# Altium PCB PCB.PcbDoc (part 2 of 2)
Units mm, origin at the board's own origin, x right, y up, seen from the top; angles counter-clockwise.
Board outline 86.36 x 54.61 mm, 4 copper layers (Component Side, Ground Plane, Power Plane, Solder Side), stack 1.226 mm thick; 22 components, 51 nets, 416 pads, 113 vias.
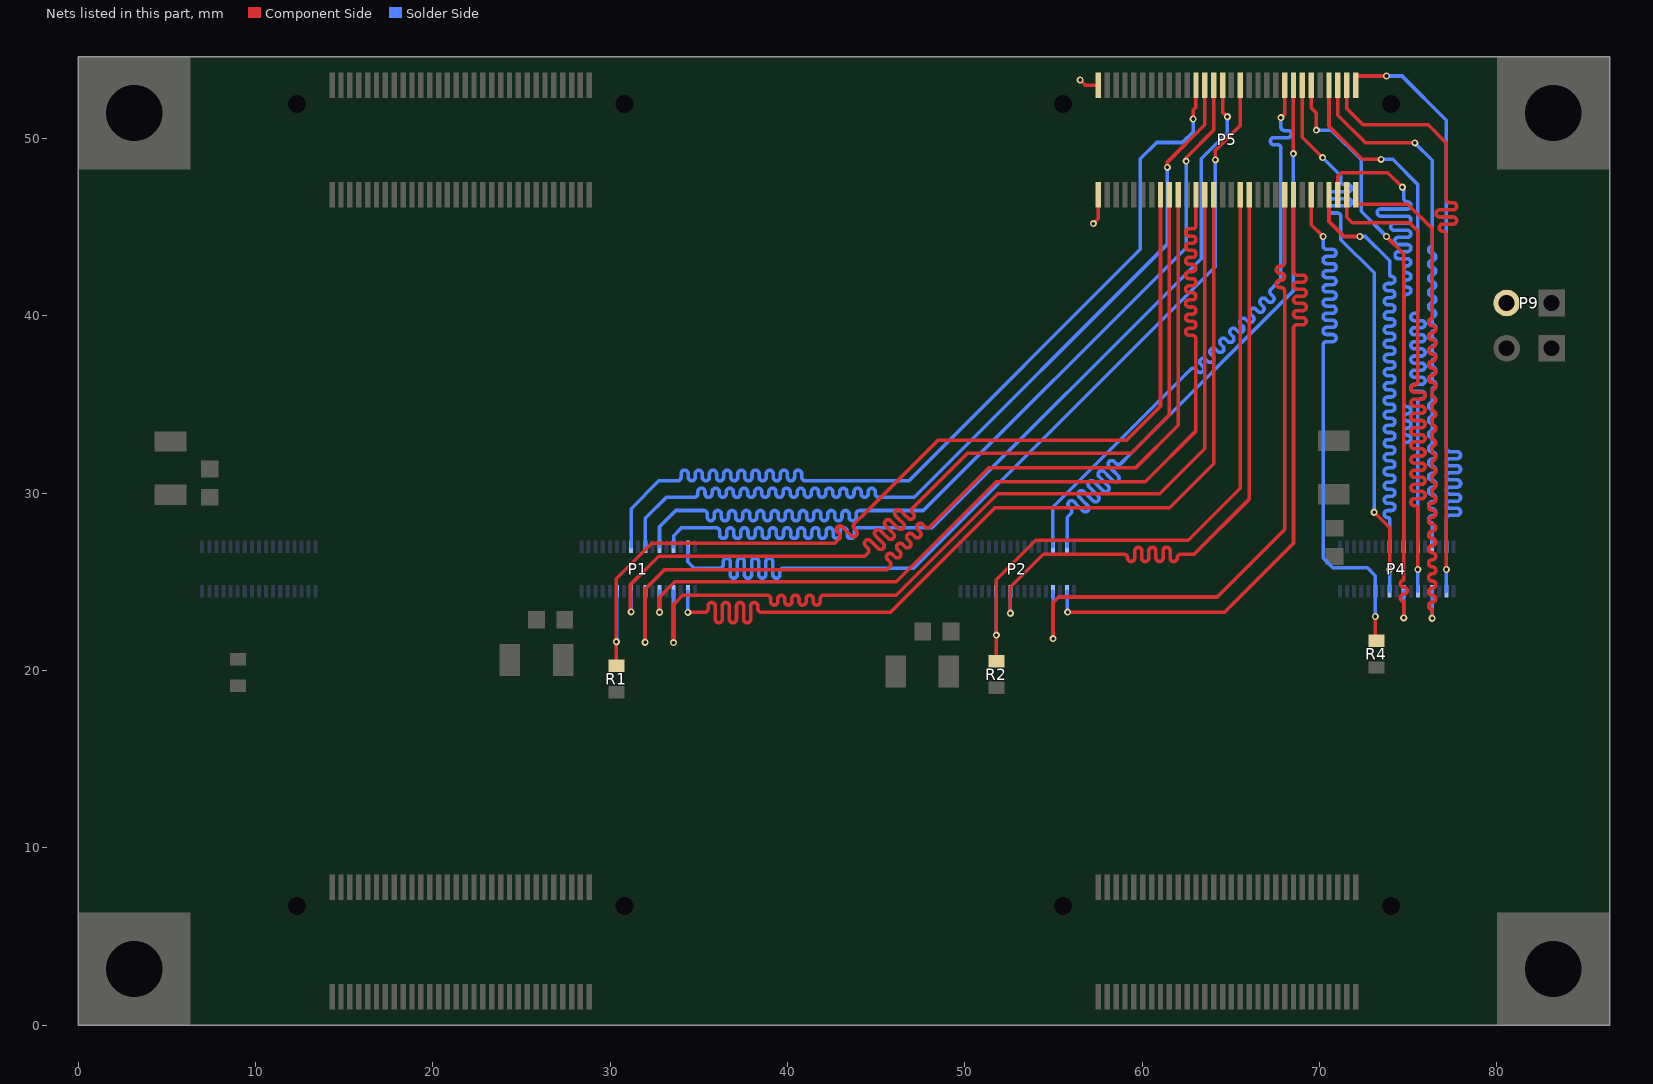
[diagram p4: the nets of this part, all layers, seen from the top]

## Via types
v1: diameter 0.4, hole 0.2, Component Side to Solder Side, tented both sides, 113 vias

## Nets (pads, with @x,y where several pads share a name; then routed paths per layer and width w, separated by ;. In a path a pad name is that pad's centre, name@x,y a point inside that pad or via, vN(x,y) a via of type N, cw(c..) or ccw(c..) an arc to the next point about the centre after c; other vN are vias at no path point) (continued)
SD2DATA3: P2.10 P5.36 | length 39.6
  Component Side w0.2: v1(52.567,23.233) 52.567,24.692 54.425,26.55 55.6,26.55 58.975,26.55 cw(c58.975,26.35) 59.175,26.35 ccw(c59.375,26.35) 59.375,26.15 ccw(c59.375,26.35) 59.575,26.35 59.575,26.55 59.575,26.75 cw(c59.775,26.75) 59.775,26.95 cw(c59.775,26.75) 59.975,26.75 59.975,26.55 59.975,26.35 ccw(c60.175,26.35) 60.175,26.15 ccw(c60.175,26.35) 60.375,26.35 60.375,26.55 60.375,26.75 cw(c60.575,26.75) 60.575,26.95 cw(c60.575,26.75) 60.775,26.75 60.775,26.55 60.775,26.35 ccw(c60.975,26.35) 60.975,26.15 ccw(c60.975,26.35) 61.175,26.35 61.175,26.55 61.175,26.75 cw(c61.375,26.75) 61.375,26.95 cw(c61.375,26.75) 61.575,26.75 61.575,26.55 61.575,26.35 ccw(c61.775,26.35) 61.775,26.15 ccw(c61.775,26.35) 61.975,26.35 cw(c62.175,26.35) 62.175,26.55 62.925,26.55 66.025,29.65 66.025,46.825 P5.36@66.032,46.832
  Solder Side w0.2: v1(52.567,23.233) P2.10@52.567,24.475
SD2DATA4: P2.4 P5.44 | length 39.6
  Component Side w0.2: v1(54.975,21.8) 54.975,23.825 55.3,24.15 64.225,24.15 68.032,27.957 68.032,37.225 68.032,41.4 ccw(c67.832,41.4) 67.832,41.6 67.759,41.6 cw(c67.759,41.8) 67.559,41.8 cw(c67.759,41.8) 67.759,42 67.832,42 ccw(c67.832,42.2) 68.032,42.2 ccw(c67.832,42.2) 67.832,42.4 67.759,42.4 cw(c67.759,42.6) 67.559,42.6 cw(c67.759,42.6) 67.759,42.8 67.832,42.8 ccw(c67.832,43) 68.032,43 68.032,43.2 68.032,43.4 P5.44@68.032,46.832
  Solder Side w0.2: P2.4@54.967,24.475 54.967,24.309 54.975,24.301 v1(54.975,21.8)
SD2DATA5: P2.2 P5.46 | length 39.6
  Component Side w0.2: v1(55.8,23.3) 64.65,23.3 68.532,27.182 68.532,30.15 68.532,39.3 cw(c68.732,39.3) 68.732,39.5 69.051,39.5 ccw(c69.051,39.7) 69.251,39.7 ccw(c69.051,39.7) 69.051,39.9 68.732,39.9 cw(c68.732,40.1) 68.532,40.1 cw(c68.732,40.1) 68.732,40.3 69.051,40.3 ccw(c69.051,40.5) 69.251,40.5 ccw(c69.051,40.5) 69.051,40.7 68.732,40.7 cw(c68.732,40.9) 68.532,40.9 cw(c68.732,40.9) 68.732,41.1 69.051,41.1 ccw(c69.051,41.3) 69.251,41.3 ccw(c69.051,41.3) 69.051,41.5 68.732,41.5 cw(c68.732,41.7) 68.532,41.7 cw(c68.732,41.7) 68.732,41.9 69.051,41.9 ccw(c69.051,42.1) 69.251,42.1 ccw(c69.051,42.1) 69.051,42.3 68.732,42.3 cw(c68.732,42.5) 68.532,42.5 P5.46@68.532,46.832
  Solder Side w0.2: P2.2@55.767,24.475 55.767,23.333 v1(55.8,23.3)
SD2DATA6: P2.33 P5.45 | length 39.6
  Component Side w0.2: v1(68.525,49.15) 68.525,52.961 68.55,52.986 P5.45@68.532,53.004
  Solder Side w0.2: P2.33@55.767,26.975 55.767,28.642 55.975,28.85 ccw(c55.834,28.991) 55.975,29.133 55.873,29.235 cw(c56.014,29.376) 55.873,29.518 cw(c56.014,29.376) 56.156,29.518 56.399,29.274 56.662,29.011 ccw(c56.804,29.153) 56.945,29.011 ccw(c56.804,29.153) 56.945,29.294 56.682,29.557 56.439,29.801 cw(c56.58,29.942) 56.439,30.083 cw(c56.58,29.942) 56.722,30.083 56.965,29.84 57.228,29.577 ccw(c57.369,29.718) 57.511,29.577 ccw(c57.369,29.718) 57.511,29.86 57.248,30.123 57.004,30.366 cw(c57.146,30.508) 57.004,30.649 cw(c57.146,30.508) 57.287,30.649 57.531,30.406 57.794,30.143 ccw(c57.935,30.284) 58.076,30.143 ccw(c57.935,30.284) 58.076,30.425 57.813,30.688 57.57,30.932 cw(c57.711,31.073) 57.57,31.215 cw(c57.711,31.073) 57.853,31.215 58.096,30.971 58.359,30.708 ccw(c58.501,30.85) 58.642,30.708 ccw(c58.501,30.85) 58.642,30.991 58.379,31.254 58.136,31.498 cw(c58.277,31.639) 58.136,31.78 cw(c58.277,31.639) 58.419,31.78 58.521,31.678 ccw(c58.662,31.82) 58.803,31.678 59.35,32.225 68.525,41.4 v1(68.525,49.15)
SD2DATA7: P2.31 P5.43 | length 39.6
  Component Side w0.2: v1(67.825,51.175) 68.032,51.382 P5.43@68.032,53.004
  Solder Side w0.2: P2.31@54.967,26.975 54.967,29.217 58.288,32.537 62.734,36.984 cw(c62.875,36.842) 63.017,36.984 63.135,36.866 ccw(c63.276,37.007) 63.418,36.866 ccw(c63.276,37.007) 63.418,37.148 63.3,37.267 cw(c63.441,37.408) 63.3,37.55 cw(c63.441,37.408) 63.582,37.55 63.701,37.431 ccw(c63.842,37.573) 63.983,37.431 ccw(c63.842,37.573) 63.983,37.714 63.865,37.832 cw(c64.007,37.974) 63.865,38.115 cw(c64.007,37.974) 64.148,38.115 64.266,37.997 ccw(c64.408,38.138) 64.549,37.997 ccw(c64.408,38.138) 64.549,38.28 64.431,38.398 cw(c64.572,38.539) 64.431,38.681 cw(c64.572,38.539) 64.714,38.681 64.832,38.563 ccw(c64.973,38.704) 65.115,38.563 ccw(c64.973,38.704) 65.115,38.846 64.997,38.964 cw(c65.138,39.105) 64.997,39.247 cw(c65.138,39.105) 65.279,39.247 65.398,39.128 ccw(c65.539,39.27) 65.68,39.128 ccw(c65.539,39.27) 65.68,39.411 65.562,39.529 cw(c65.704,39.671) 65.562,39.812 cw(c65.704,39.671) 65.845,39.812 65.963,39.694 ccw(c66.105,39.835) 66.246,39.694 ccw(c66.105,39.835) 66.246,39.977 66.128,40.095 cw(c66.269,40.237) 66.128,40.378 cw(c66.269,40.237) 66.411,40.378 66.529,40.26 ccw(c66.67,40.401) 66.812,40.26 ccw(c66.67,40.401) 66.812,40.543 66.694,40.661 cw(c66.835,40.802) 66.694,40.944 cw(c66.835,40.802) 66.976,40.944 67.095,40.825 ccw(c67.236,40.967) 67.378,40.825 ccw(c67.236,40.967) 67.378,41.108 67.259,41.226 cw(c67.401,41.368) 67.259,41.509 67.401,41.651 67.684,41.934 67.825,42.075 67.825,42.45 67.825,42.85 67.825,43.25 67.825,43.65 67.825,44.05 67.825,44.45 67.825,44.85 67.825,45.25 67.825,45.65 67.825,46.05 67.825,46.45 67.825,46.85 67.825,47.25 67.825,47.65 67.825,48.05 67.825,48.45 67.825,48.85 67.825,49.25 67.825,49.45 ccw(c67.625,49.45) 67.625,49.65 67.43,49.65 cw(c67.43,49.85) 67.23,49.85 cw(c67.43,49.85) 67.43,50.05 67.825,50.05 68.22,50.05 ccw(c68.22,50.25) 68.42,50.25 ccw(c68.22,50.25) 68.22,50.45 68.025,50.45 cw(c68.025,50.65) 67.825,50.65 v1(67.825,51.175)
SD2RESET: P2.12 P5.34 R2.2 | length 39.6
  Component Side w0.2: R2.2@51.775,20.5 R2.2@51.775,20.525 v1(51.775,22) 51.775,25.108 51.767,25.117 54,27.35 62.6,27.35 65.532,30.282 P5.34@65.532,46.832
  Solder Side w0.2: P2.12@51.767,24.475 51.775,24.467 v1(51.775,22)
SD3CLK: P1.8 P5.20 | length 56.1
  Component Side w0.2: v1(31.975,21.6) 31.975,24.6 33.05,25.675 45.6,25.675 45.775,25.85 ccw(c45.634,25.991) 45.775,26.133 45.643,26.265 cw(c45.785,26.406) 45.643,26.547 cw(c45.785,26.406) 45.926,26.547 46.058,26.416 ccw(c46.199,26.557) 46.341,26.416 ccw(c46.199,26.557) 46.341,26.699 46.209,26.83 cw(c46.35,26.972) 46.209,27.113 cw(c46.35,26.972) 46.492,27.113 46.624,26.981 ccw(c46.765,27.123) 46.906,26.981 ccw(c46.765,27.123) 46.906,27.264 46.775,27.396 cw(c46.916,27.537) 46.775,27.679 cw(c46.916,27.537) 47.057,27.679 47.189,27.547 ccw(c47.331,27.688) 47.472,27.547 ccw(c47.331,27.688) 47.472,27.83 47.34,27.962 cw(c47.482,28.103) 47.34,28.245 cw(c47.482,28.103) 47.623,28.245 47.755,28.113 ccw(c47.896,28.254) 48.038,28.113 49.838,29.913 51.35,31.425 59.625,31.425 62.032,33.832 P5.20@62.032,46.832
  Solder Side w0.2: v1(31.975,21.6) 31.975,24.467 P1.8@31.983,24.475
SD3CMD: P1.25 P5.23 | length 56
  Component Side w0.2: v1(62.875,51.1) 62.875,51.618 63.032,51.775 P5.23@63.032,53.004
  Solder Side w0.2: P1.25@31.183,26.975 31.183,29.133 32.75,30.7 33.8,30.7 ccw(c33.8,30.9) 34,30.9 34,31.1 cw(c34.2,31.1) 34.2,31.3 cw(c34.2,31.1) 34.4,31.1 34.4,30.9 ccw(c34.6,30.9) 34.6,30.7 ccw(c34.6,30.9) 34.8,30.9 34.8,31.1 cw(c35,31.1) 35,31.3 cw(c35,31.1) 35.2,31.1 35.2,30.9 ccw(c35.4,30.9) 35.4,30.7 ccw(c35.4,30.9) 35.6,30.9 35.6,31.1 cw(c35.8,31.1) 35.8,31.3 cw(c35.8,31.1) 36,31.1 36,30.9 ccw(c36.2,30.9) 36.2,30.7 ccw(c36.2,30.9) 36.4,30.9 36.4,31.1 cw(c36.6,31.1) 36.6,31.3 cw(c36.6,31.1) 36.8,31.1 36.8,30.9 ccw(c37,30.9) 37,30.7 ccw(c37,30.9) 37.2,30.9 37.2,31.1 cw(c37.4,31.1) 37.4,31.3 cw(c37.4,31.1) 37.6,31.1 37.6,30.9 ccw(c37.8,30.9) 37.8,30.7 ccw(c37.8,30.9) 38,30.9 38,31.1 cw(c38.2,31.1) 38.2,31.3 cw(c38.2,31.1) 38.4,31.1 38.4,30.9 ccw(c38.6,30.9) 38.6,30.7 ccw(c38.6,30.9) 38.8,30.9 38.8,31.1 cw(c39,31.1) 39,31.3 cw(c39,31.1) 39.2,31.1 39.2,30.9 ccw(c39.4,30.9) 39.4,30.7 ccw(c39.4,30.9) 39.6,30.9 39.6,31.1 cw(c39.8,31.1) 39.8,31.3 cw(c39.8,31.1) 40,31.1 40,30.9 ccw(c40.2,30.9) 40.2,30.7 ccw(c40.2,30.9) 40.4,30.9 40.4,31.1 cw(c40.6,31.1) 40.6,31.3 cw(c40.6,31.1) 40.8,31.1 40.8,30.9 ccw(c41,30.9) 41,30.7 45.975,30.7 46.85,30.7 59.9,43.75 59.9,48.85 60.825,49.775 62.275,49.775 62.875,50.375 v1(62.875,51.1)
SD3DATA0: P1.6 P5.24 | length 56.1
  Component Side w0.2: v1(32.783,23.292) 32.783,24.133 33.65,25 46.125,25 51.775,30.65 60.175,30.65 63.032,33.507 63.032,36.25 63.032,38.7 ccw(c62.832,38.7) 62.832,38.9 62.649,38.9 cw(c62.649,39.1) 62.449,39.1 cw(c62.649,39.1) 62.649,39.3 62.832,39.3 ccw(c62.832,39.5) 63.032,39.5 ccw(c62.832,39.5) 62.832,39.7 62.649,39.7 cw(c62.649,39.9) 62.449,39.9 cw(c62.649,39.9) 62.649,40.1 62.832,40.1 ccw(c62.832,40.3) 63.032,40.3 ccw(c62.832,40.3) 62.832,40.5 62.649,40.5 cw(c62.649,40.7) 62.449,40.7 cw(c62.649,40.7) 62.649,40.9 62.832,40.9 ccw(c62.832,41.1) 63.032,41.1 ccw(c62.832,41.1) 62.832,41.3 62.649,41.3 cw(c62.649,41.5) 62.449,41.5 cw(c62.649,41.5) 62.649,41.7 62.832,41.7 ccw(c62.832,41.9) 63.032,41.9 ccw(c62.832,41.9) 62.832,42.1 62.649,42.1 cw(c62.649,42.3) 62.449,42.3 cw(c62.649,42.3) 62.649,42.5 62.832,42.5 ccw(c62.832,42.7) 63.032,42.7 ccw(c62.832,42.7) 62.832,42.9 62.649,42.9 cw(c62.649,43.1) 62.449,43.1 cw(c62.649,43.1) 62.649,43.3 62.832,43.3 ccw(c62.832,43.5) 63.032,43.5 ccw(c62.832,43.5) 62.832,43.7 62.649,43.7 cw(c62.649,43.9) 62.449,43.9 cw(c62.649,43.9) 62.649,44.1 62.832,44.1 ccw(c62.832,44.3) 63.032,44.3 ccw(c62.832,44.3) 62.832,44.5 62.649,44.5 cw(c62.649,44.7) 62.449,44.7 cw(c62.649,44.7) 62.649,44.9 62.832,44.9 ccw(c62.832,45.1) 63.032,45.1 63.032,45.3 63.032,45.5 P5.24@63.032,46.832
  Solder Side w0.2: v1(32.783,23.292) P1.6@32.783,24.475
SD3DATA1: P1.29 P5.27 | length 56
  Component Side w0.2: v1(62.475,48.725) 62.475,48.925 64.032,50.482 P5.27@64.032,53.004
  Solder Side w0.2: P1.29@32.783,26.975 32.783,28.108 33.7,29.025 34.875,29.025 35.075,29.025 35.275,29.025 cw(c35.275,28.825) 35.475,28.825 35.475,28.65 ccw(c35.675,28.65) 35.675,28.45 ccw(c35.675,28.65) 35.875,28.65 35.875,28.825 cw(c36.075,28.825) 36.075,29.025 cw(c36.075,28.825) 36.275,28.825 36.275,28.65 ccw(c36.475,28.65) 36.475,28.45 ccw(c36.475,28.65) 36.675,28.65 36.675,28.825 cw(c36.875,28.825) 36.875,29.025 cw(c36.875,28.825) 37.075,28.825 37.075,28.65 ccw(c37.275,28.65) 37.275,28.45 ccw(c37.275,28.65) 37.475,28.65 37.475,28.825 cw(c37.675,28.825) 37.675,29.025 cw(c37.675,28.825) 37.875,28.825 37.875,28.65 ccw(c38.075,28.65) 38.075,28.45 ccw(c38.075,28.65) 38.275,28.65 38.275,28.825 cw(c38.475,28.825) 38.475,29.025 cw(c38.475,28.825) 38.675,28.825 38.675,28.65 ccw(c38.875,28.65) 38.875,28.45 ccw(c38.875,28.65) 39.075,28.65 39.075,28.825 cw(c39.275,28.825) 39.275,29.025 cw(c39.275,28.825) 39.475,28.825 39.475,28.65 ccw(c39.675,28.65) 39.675,28.45 ccw(c39.675,28.65) 39.875,28.65 39.875,28.825 cw(c40.075,28.825) 40.075,29.025 cw(c40.075,28.825) 40.275,28.825 40.275,28.65 ccw(c40.475,28.65) 40.475,28.45 ccw(c40.475,28.65) 40.675,28.65 40.675,28.825 cw(c40.875,28.825) 40.875,29.025 cw(c40.875,28.825) 41.075,28.825 41.075,28.65 ccw(c41.275,28.65) 41.275,28.45 ccw(c41.275,28.65) 41.475,28.65 41.475,28.825 cw(c41.675,28.825) 41.675,29.025 cw(c41.675,28.825) 41.875,28.825 41.875,28.65 ccw(c42.075,28.65) 42.075,28.45 ccw(c42.075,28.65) 42.275,28.65 42.275,28.825 cw(c42.475,28.825) 42.475,29.025 cw(c42.475,28.825) 42.675,28.825 42.675,28.65 ccw(c42.875,28.65) 42.875,28.45 ccw(c42.875,28.65) 43.075,28.65 43.075,28.825 cw(c43.275,28.825) 43.275,29.025 cw(c43.275,28.825) 43.475,28.825 43.475,28.65 ccw(c43.675,28.65) 43.675,28.45 ccw(c43.675,28.65) 43.875,28.65 43.875,28.825 cw(c44.075,28.825) 44.075,29.025 46.35,29.025 47.65,29.025 62.475,43.85 v1(62.475,48.725)
SD3DATA2: P1.27 P5.25 | length 56.1
  Component Side w0.2: v1(61.425,48.375) 61.425,48.675 63.532,50.782 P5.25@63.532,53.004
  Solder Side w0.2: P1.27@31.983,26.975 31.983,28.583 33.175,29.775 34.75,29.775 ccw(c34.75,29.975) 34.95,29.975 34.95,30.085 cw(c35.15,30.085) 35.15,30.285 cw(c35.15,30.085) 35.35,30.085 35.35,29.975 ccw(c35.55,29.975) 35.55,29.775 ccw(c35.55,29.975) 35.75,29.975 35.75,30.085 cw(c35.95,30.085) 35.95,30.285 cw(c35.95,30.085) 36.15,30.085 36.15,29.975 ccw(c36.35,29.975) 36.35,29.775 ccw(c36.35,29.975) 36.55,29.975 36.55,30.085 cw(c36.75,30.085) 36.75,30.285 cw(c36.75,30.085) 36.95,30.085 36.95,29.975 ccw(c37.15,29.975) 37.15,29.775 ccw(c37.15,29.975) 37.35,29.975 37.35,30.085 cw(c37.55,30.085) 37.55,30.285 cw(c37.55,30.085) 37.75,30.085 37.75,29.975 ccw(c37.95,29.975) 37.95,29.775 ccw(c37.95,29.975) 38.15,29.975 38.15,30.085 cw(c38.35,30.085) 38.35,30.285 cw(c38.35,30.085) 38.55,30.085 38.55,29.975 ccw(c38.75,29.975) 38.75,29.775 ccw(c38.75,29.975) 38.95,29.975 38.95,30.085 cw(c39.15,30.085) 39.15,30.285 cw(c39.15,30.085) 39.35,30.085 39.35,29.975 ccw(c39.55,29.975) 39.55,29.775 ccw(c39.55,29.975) 39.75,29.975 39.75,30.085 cw(c39.95,30.085) 39.95,30.285 cw(c39.95,30.085) 40.15,30.085 40.15,29.975 ccw(c40.35,29.975) 40.35,29.775 ccw(c40.35,29.975) 40.55,29.975 40.55,30.085 cw(c40.75,30.085) 40.75,30.285 cw(c40.75,30.085) 40.95,30.085 40.95,29.975 ccw(c41.15,29.975) 41.15,29.775 ccw(c41.15,29.975) 41.35,29.975 41.35,30.085 cw(c41.55,30.085) 41.55,30.285 cw(c41.55,30.085) 41.75,30.085 41.75,29.975 ccw(c41.95,29.975) 41.95,29.775 ccw(c41.95,29.975) 42.15,29.975 42.15,30.085 cw(c42.35,30.085) 42.35,30.285 cw(c42.35,30.085) 42.55,30.085 42.55,29.975 ccw(c42.75,29.975) 42.75,29.775 ccw(c42.75,29.975) 42.95,29.975 42.95,30.085 cw(c43.15,30.085) 43.15,30.285 cw(c43.15,30.085) 43.35,30.085 43.35,29.975 ccw(c43.55,29.975) 43.55,29.775 ccw(c43.55,29.975) 43.75,29.975 43.75,30.085 cw(c43.95,30.085) 43.95,30.285 cw(c43.95,30.085) 44.15,30.085 44.15,29.975 ccw(c44.35,29.975) 44.35,29.775 ccw(c44.35,29.975) 44.55,29.975 44.55,30.085 cw(c44.75,30.085) 44.75,30.285 cw(c44.75,30.085) 44.95,30.085 44.95,29.975 ccw(c45.15,29.975) 45.15,29.775 47.15,29.775 61.425,44.05 v1(61.425,48.375)
SD3DATA3: P1.10 P5.18 | length 56.1
  Component Side w0.2: v1(31.183,23.308) 31.15,23.275 31.15,23.308 31.15,24.85 32.75,26.45 44.35,26.45 44.525,26.625 ccw(c44.384,26.766) 44.525,26.908 44.398,27.035 cw(c44.539,27.177) 44.398,27.318 cw(c44.539,27.177) 44.68,27.318 44.949,27.049 45.111,26.888 ccw(c45.252,27.029) 45.394,26.888 ccw(c45.252,27.029) 45.394,27.171 45.232,27.332 44.963,27.601 cw(c45.105,27.742) 44.963,27.884 cw(c45.105,27.742) 45.246,27.884 45.515,27.615 45.676,27.454 ccw(c45.818,27.595) 45.959,27.454 ccw(c45.818,27.595) 45.959,27.736 45.798,27.898 45.529,28.167 cw(c45.67,28.308) 45.529,28.449 cw(c45.67,28.308) 45.812,28.449 46.081,28.181 46.242,28.019 ccw(c46.383,28.161) 46.525,28.019 ccw(c46.383,28.161) 46.525,28.302 46.363,28.463 46.095,28.732 cw(c46.236,28.874) 46.095,29.015 cw(c46.236,28.874) 46.377,29.015 46.646,28.746 46.808,28.585 ccw(c46.949,28.726) 47.091,28.585 ccw(c46.949,28.726) 47.091,28.868 47.071,28.888 cw(c47.212,29.029) 47.071,29.171 47.412,29.512 50.15,32.25 59.375,32.25 61.532,34.407 P5.18@61.532,46.832
  Solder Side w0.2: v1(31.183,23.308) P1.10@31.183,24.475
SD3DATA4: P1.4 P5.26 | length 56.1
  Component Side w0.2: v1(33.575,21.575) 33.575,23.725 34.1,24.25 36.05,24.25 36.25,24.25 36.65,24.25 37.05,24.25 37.45,24.25 37.85,24.25 38.25,24.25 38.65,24.25 38.85,24.25 cw(c38.85,24.05) 39.05,24.05 39.05,23.89 ccw(c39.25,23.89) 39.25,23.69 ccw(c39.25,23.89) 39.45,23.89 39.45,24.05 cw(c39.65,24.05) 39.65,24.25 cw(c39.65,24.05) 39.85,24.05 39.85,23.89 ccw(c40.05,23.89) 40.05,23.69 ccw(c40.05,23.89) 40.25,23.89 40.25,24.05 cw(c40.45,24.05) 40.45,24.25 cw(c40.45,24.05) 40.65,24.05 40.65,23.89 ccw(c40.85,23.89) 40.85,23.69 ccw(c40.85,23.89) 41.05,23.89 41.05,24.05 cw(c41.25,24.05) 41.25,24.25 cw(c41.25,24.05) 41.45,24.05 41.45,23.89 ccw(c41.65,23.89) 41.65,23.69 ccw(c41.65,23.89) 41.85,23.89 41.85,24.05 cw(c42.05,24.05) 42.05,24.25 45.85,24.25 46.125,24.25 51.85,29.975 61,29.975 63.532,32.507 P5.26@63.532,46.832
  Solder Side w0.2: v1(33.575,21.575) 33.575,24.467 P1.4@33.583,24.475
SD3DATA5: P1.2 P5.28 | length 56.1
  Component Side w0.2: v1(34.383,23.283) 35.325,23.283 ccw(c35.325,23.483) 35.525,23.483 35.525,23.638 cw(c35.725,23.638) 35.725,23.838 cw(c35.725,23.638) 35.925,23.638 35.925,23.283 35.925,22.895 ccw(c36.125,22.895) 36.125,22.695 ccw(c36.125,22.895) 36.325,22.895 36.325,23.283 36.325,23.638 cw(c36.525,23.638) 36.525,23.838 cw(c36.525,23.638) 36.725,23.638 36.725,23.283 36.725,22.895 ccw(c36.925,22.895) 36.925,22.695 ccw(c36.925,22.895) 37.125,22.895 37.125,23.283 37.125,23.638 cw(c37.325,23.638) 37.325,23.838 cw(c37.325,23.638) 37.525,23.638 37.525,23.283 37.525,22.895 ccw(c37.725,22.895) 37.725,22.695 ccw(c37.725,22.895) 37.925,22.895 37.925,23.283 37.925,23.638 cw(c38.125,23.638) 38.125,23.838 cw(c38.125,23.638) 38.325,23.638 38.325,23.483 ccw(c38.525,23.483) 38.525,23.283 43.1,23.283 45.808,23.283 51.7,29.175 61.55,29.175 64.032,31.657 P5.28@64.032,46.832
  Solder Side w0.2: v1(34.383,23.283) P1.2@34.383,24.475
SD3DATA6: P1.33 P5.33 | length 56.1
  Component Side w0.2: v1(64.125,48.8) 64.125,49.325 65.532,50.732 P5.33@65.532,53.004
  Solder Side w0.2: P1.33@34.383,26.975 34.383,26.142 34.75,25.775 36.175,25.775 ccw(c36.175,25.975) 36.375,25.975 36.375,26.14 cw(c36.575,26.14) 36.575,26.34 cw(c36.575,26.14) 36.775,26.14 36.775,25.775 36.775,25.41 ccw(c36.975,25.41) 36.975,25.21 ccw(c36.975,25.41) 37.175,25.41 37.175,25.775 37.175,26.14 cw(c37.375,26.14) 37.375,26.34 cw(c37.375,26.14) 37.575,26.14 37.575,25.775 37.575,25.41 ccw(c37.775,25.41) 37.775,25.21 ccw(c37.775,25.41) 37.975,25.41 37.975,25.775 37.975,26.14 cw(c38.175,26.14) 38.175,26.34 cw(c38.175,26.14) 38.375,26.14 38.375,25.775 38.375,25.41 ccw(c38.575,25.41) 38.575,25.21 ccw(c38.575,25.41) 38.775,25.41 38.775,25.775 38.775,26.14 cw(c38.975,26.14) 38.975,26.34 cw(c38.975,26.14) 39.175,26.14 39.175,25.775 39.175,25.41 ccw(c39.375,25.41) 39.375,25.21 ccw(c39.375,25.41) 39.575,25.41 39.575,25.575 cw(c39.775,25.575) 39.775,25.775 45.175,25.775 47.125,25.775 64.125,42.775 v1(64.125,48.8)
SD3DATA7: P1.31 P5.29 | length 56
  Component Side w0.2: P5.29@64.532,53.004 64.532,51.493 v1(64.8,51.225)
  Solder Side w0.2: P1.31@33.583,26.975 33.583,27.608 34.025,28.05 35.575,28.05 35.775,28.05 35.975,28.05 cw(c35.975,27.85) 36.175,27.85 36.175,27.65 ccw(c36.375,27.65) 36.375,27.45 ccw(c36.375,27.65) 36.575,27.65 36.575,27.85 cw(c36.775,27.85) 36.775,28.05 cw(c36.775,27.85) 36.975,27.85 36.975,27.65 ccw(c37.175,27.65) 37.175,27.45 ccw(c37.175,27.65) 37.375,27.65 37.375,27.85 cw(c37.575,27.85) 37.575,28.05 cw(c37.575,27.85) 37.775,27.85 37.775,27.65 ccw(c37.975,27.65) 37.975,27.45 ccw(c37.975,27.65) 38.175,27.65 38.175,27.85 cw(c38.375,27.85) 38.375,28.05 cw(c38.375,27.85) 38.575,27.85 38.575,27.65 ccw(c38.775,27.65) 38.775,27.45 ccw(c38.775,27.65) 38.975,27.65 38.975,27.85 cw(c39.175,27.85) 39.175,28.05 cw(c39.175,27.85) 39.375,27.85 39.375,27.65 ccw(c39.575,27.65) 39.575,27.45 ccw(c39.575,27.65) 39.775,27.65 39.775,27.85 cw(c39.975,27.85) 39.975,28.05 cw(c39.975,27.85) 40.175,27.85 40.175,27.65 ccw(c40.375,27.65) 40.375,27.45 ccw(c40.375,27.65) 40.575,27.65 40.575,27.85 cw(c40.775,27.85) 40.775,28.05 cw(c40.775,27.85) 40.975,27.85 40.975,27.65 ccw(c41.175,27.65) 41.175,27.45 ccw(c41.175,27.65) 41.375,27.65 41.375,27.85 cw(c41.575,27.85) 41.575,28.05 cw(c41.575,27.85) 41.775,27.85 41.775,27.65 ccw(c41.975,27.65) 41.975,27.45 ccw(c41.975,27.65) 42.175,27.65 42.175,27.85 cw(c42.375,27.85) 42.375,28.05 cw(c42.375,27.85) 42.575,27.85 42.575,27.65 ccw(c42.775,27.65) 42.775,27.45 ccw(c42.775,27.65) 42.975,27.65 42.975,27.85 cw(c43.175,27.85) 43.175,28.05 cw(c43.175,27.85) 43.375,27.85 43.375,27.65 ccw(c43.575,27.65) 43.575,27.45 ccw(c43.575,27.65) 43.775,27.65 43.775,27.85 cw(c43.975,27.85) 43.975,28.05 47.05,28.05 47.25,28.05 47.65,28.05 48.05,28.05 48.15,28.05 48.291,28.191 ; 48.212,28.112 48.291,28.191 ; v1(64.8,51.225) 64.8,50.325 63.325,48.85 63.325,43.225 48.291,28.191
SD3RESET: P1.12 P5.16 R1.2 | length 56.1
  Component Side w0.2: R1.2@30.35,20.275 v1(30.35,21.625) 30.35,25.175 32.35,27.175 42.675,27.175 42.925,27.425 ccw(c42.784,27.566) 42.925,27.708 42.821,27.812 cw(c42.962,27.954) 42.821,28.095 cw(c42.962,27.954) 43.103,28.095 43.349,27.849 43.595,27.603 ccw(c43.737,27.745) 43.878,27.603 ccw(c43.737,27.745) 43.878,27.886 43.774,27.991 cw(c43.915,28.132) 43.774,28.274 44.425,28.925 48.5,33 59.125,33 61.032,34.907 P5.16@61.032,46.832
  Solder Side w0.2: v1(30.35,21.625) 30.375,21.65 30.375,24.467 P1.12@30.383,24.475
SD4CLK: P4.8 P5.49 | length 34.9
  Component Side w0.2: P5.49@69.532,53.004 69.525,52.997 69.525,51.725 69.825,51.425 v1(69.825,50.475) ; v1(73.775,44.475) 74.75,43.5 74.75,28.375 74.75,25.1 ccw(c74.75,24.9) 74.55,24.9 ccw(c74.75,24.9) 74.75,24.7 cw(c74.75,24.5) 74.95,24.5 cw(c74.75,24.5) 74.75,24.3 ccw(c74.75,24.1) 74.55,24.1 ccw(c74.75,24.1) 74.75,23.9 74.75,23.7 v1(74.75,22.975)
  Solder Side w0.2: v1(69.825,50.475) 70.675,50.475 72.35,48.8 72.35,45.9 v1(73.775,44.475) ; v1(74.75,22.975) P4.8@74.75,24.475
SD4CMD: P4.25 P5.54 | length 36.5
  Component Side w0.2: P5.54@70.532,46.832 70.532,45.318 71.375,44.475 v1(72.275,44.475)
  Solder Side w0.2: v1(72.275,44.475) 72.575,44.475 73.95,43.1 73.95,42.425 73.95,42.325 ccw(c74.05,42.325) 74.05,42.225 cw(c74.05,42.025) 74.25,42.025 cw(c74.05,42.025) 74.05,41.825 73.95,41.825 73.85,41.825 ccw(c73.85,41.625) 73.65,41.625 ccw(c73.85,41.625) 73.85,41.425 73.95,41.425 74.05,41.425 cw(c74.05,41.225) 74.25,41.225 cw(c74.05,41.225) 74.05,41.025 73.95,41.025 73.85,41.025 ccw(c73.85,40.825) 73.65,40.825 ccw(c73.85,40.825) 73.85,40.625 73.95,40.625 74.05,40.625 cw(c74.05,40.425) 74.25,40.425 cw(c74.05,40.425) 74.05,40.225 73.95,40.225 73.85,40.225 ccw(c73.85,40.025) 73.65,40.025 ccw(c73.85,40.025) 73.85,39.825 73.95,39.825 74.05,39.825 cw(c74.05,39.625) 74.25,39.625 cw(c74.05,39.625) 74.05,39.425 73.95,39.425 73.85,39.425 ccw(c73.85,39.225) 73.65,39.225 ccw(c73.85,39.225) 73.85,39.025 73.95,39.025 74.05,39.025 cw(c74.05,38.825) 74.25,38.825 cw(c74.05,38.825) 74.05,38.625 73.95,38.625 73.85,38.625 ccw(c73.85,38.425) 73.65,38.425 ccw(c73.85,38.425) 73.85,38.225 73.95,38.225 74.05,38.225 cw(c74.05,38.025) 74.25,38.025 cw(c74.05,38.025) 74.05,37.825 73.95,37.825 73.85,37.825 ccw(c73.85,37.625) 73.65,37.625 ccw(c73.85,37.625) 73.85,37.425 73.95,37.425 74.05,37.425 cw(c74.05,37.225) 74.25,37.225 cw(c74.05,37.225) 74.05,37.025 73.95,37.025 73.85,37.025 ccw(c73.85,36.825) 73.65,36.825 ccw(c73.85,36.825) 73.85,36.625 73.95,36.625 74.05,36.625 cw(c74.05,36.425) 74.25,36.425 cw(c74.05,36.425) 74.05,36.225 73.95,36.225 73.85,36.225 ccw(c73.85,36.025) 73.65,36.025 ccw(c73.85,36.025) 73.85,35.825 73.95,35.825 74.05,35.825 cw(c74.05,35.625) 74.25,35.625 cw(c74.05,35.625) 74.05,35.425 73.95,35.425 73.85,35.425 ccw(c73.85,35.225) 73.65,35.225 ccw(c73.85,35.225) 73.85,35.025 73.95,35.025 74.05,35.025 cw(c74.05,34.825) 74.25,34.825 cw(c74.05,34.825) 74.05,34.625 73.95,34.625 73.85,34.625 ccw(c73.85,34.425) 73.65,34.425 ccw(c73.85,34.425) 73.85,34.225 73.95,34.225 74.05,34.225 cw(c74.05,34.025) 74.25,34.025 cw(c74.05,34.025) 74.05,33.825 73.95,33.825 73.85,33.825 ccw(c73.85,33.625) 73.65,33.625 ccw(c73.85,33.625) 73.85,33.425 73.95,33.425 74.05,33.425 cw(c74.05,33.225) 74.25,33.225 cw(c74.05,33.225) 74.05,33.025 73.95,33.025 73.85,33.025 ccw(c73.85,32.825) 73.65,32.825 ccw(c73.85,32.825) 73.85,32.625 73.95,32.625 74.05,32.625 cw(c74.05,32.425) 74.25,32.425 cw(c74.05,32.425) 74.05,32.225 73.95,32.225 73.85,32.225 ccw(c73.85,32.025) 73.65,32.025 ccw(c73.85,32.025) 73.85,31.825 73.95,31.825 74.05,31.825 cw(c74.05,31.625) 74.25,31.625 cw(c74.05,31.625) 74.05,31.425 73.95,31.425 73.85,31.425 ccw(c73.85,31.225) 73.65,31.225 ccw(c73.85,31.225) 73.85,31.025 73.95,31.025 74.05,31.025 cw(c74.05,30.825) 74.25,30.825 cw(c74.05,30.825) 74.05,30.625 73.95,30.625 73.85,30.625 ccw(c73.85,30.425) 73.65,30.425 ccw(c73.85,30.425) 73.85,30.225 73.95,30.225 74.05,30.225 cw(c74.05,30.025) 74.25,30.025 cw(c74.05,30.025) 74.05,29.825 73.95,29.825 73.85,29.825 ccw(c73.85,29.625) 73.65,29.625 ccw(c73.85,29.625) 73.85,29.425 73.95,29.425 74.05,29.425 cw(c74.05,29.225) 74.25,29.225 cw(c74.05,29.225) 74.05,29.025 73.95,29.025 73.85,29.025 ccw(c73.85,28.825) 73.65,28.825 ccw(c73.85,28.825) 73.85,28.625 cw(c73.85,28.525) 73.95,28.525 73.95,28.475 P4.25@73.95,26.975
SD4DATA0: P4.6 P5.58 | length 36.4
  Component Side w0.2: P5.58@71.532,46.832 71.532,45.568 71.85,45.25 75.075,45.25 75.55,44.775 75.55,39.9 75.55,36.3 cw(c75.35,36.3) 75.35,36.1 ccw(c75.35,35.9) 75.15,35.9 ccw(c75.35,35.9) 75.35,35.7 75.55,35.7 75.75,35.7 cw(c75.75,35.5) 75.95,35.5 cw(c75.75,35.5) 75.75,35.3 75.55,35.3 75.35,35.3 ccw(c75.35,35.1) 75.15,35.1 ccw(c75.35,35.1) 75.35,34.9 75.55,34.9 75.75,34.9 cw(c75.75,34.7) 75.95,34.7 cw(c75.75,34.7) 75.75,34.5 75.55,34.5 75.35,34.5 ccw(c75.35,34.3) 75.15,34.3 ccw(c75.35,34.3) 75.35,34.1 75.55,34.1 75.75,34.1 cw(c75.75,33.9) 75.95,33.9 cw(c75.75,33.9) 75.75,33.7 75.55,33.7 75.35,33.7 ccw(c75.35,33.5) 75.15,33.5 ccw(c75.35,33.5) 75.35,33.3 75.55,33.3 75.75,33.3 cw(c75.75,33.1) 75.95,33.1 cw(c75.75,33.1) 75.75,32.9 75.55,32.9 75.35,32.9 ccw(c75.35,32.7) 75.15,32.7 ccw(c75.35,32.7) 75.35,32.5 75.55,32.5 75.75,32.5 cw(c75.75,32.3) 75.95,32.3 cw(c75.75,32.3) 75.75,32.1 75.55,32.1 75.35,32.1 ccw(c75.35,31.9) 75.15,31.9 ccw(c75.35,31.9) 75.35,31.7 75.55,31.7 75.75,31.7 cw(c75.75,31.5) 75.95,31.5 cw(c75.75,31.5) 75.75,31.3 75.55,31.3 75.35,31.3 ccw(c75.35,31.1) 75.15,31.1 ccw(c75.35,31.1) 75.35,30.9 75.55,30.9 75.75,30.9 cw(c75.75,30.7) 75.95,30.7 cw(c75.75,30.7) 75.75,30.5 75.55,30.5 75.35,30.5 ccw(c75.35,30.3) 75.15,30.3 ccw(c75.35,30.3) 75.35,30.1 75.55,30.1 75.75,30.1 cw(c75.75,29.9) 75.95,29.9 cw(c75.75,29.9) 75.75,29.7 75.55,29.7 75.35,29.7 ccw(c75.35,29.5) 75.15,29.5 ccw(c75.35,29.5) 75.35,29.3 cw(c75.35,29.1) 75.55,29.1 v1(75.55,25.7)
  Solder Side w0.2: P4.6@75.55,24.475 v1(75.55,25.7)
SD4DATA1: P4.29 P5.53 | length 36.5
  Component Side w0.2: P5.53@70.532,53.004 70.532,50.693 72.4,48.825 v1(73.475,48.825)
  Solder Side w0.2: v1(73.475,48.825) 74.125,48.825 75.55,47.4 75.55,40.325 cw(c75.363,40.325) 75.363,40.137 75.35,40.137 ccw(c75.35,39.937) 75.15,39.937 ccw(c75.35,39.937) 75.35,39.737 75.55,39.737 75.75,39.737 cw(c75.75,39.537) 75.95,39.537 cw(c75.75,39.537) 75.75,39.337 75.55,39.337 75.35,39.337 ccw(c75.35,39.137) 75.15,39.137 ccw(c75.35,39.137) 75.35,38.937 75.55,38.937 75.75,38.937 cw(c75.75,38.737) 75.95,38.737 cw(c75.75,38.737) 75.75,38.537 75.55,38.537 75.35,38.537 ccw(c75.35,38.337) 75.15,38.337 ccw(c75.35,38.337) 75.35,38.137 75.55,38.137 75.75,38.137 cw(c75.75,37.937) 75.95,37.937 cw(c75.75,37.937) 75.75,37.737 75.55,37.737 75.35,37.737 ccw(c75.35,37.537) 75.15,37.537 ccw(c75.35,37.537) 75.35,37.337 75.55,37.337 75.75,37.337 cw(c75.75,37.137) 75.95,37.137 cw(c75.75,37.137) 75.75,36.937 75.55,36.937 75.35,36.937 ccw(c75.35,36.737) 75.15,36.737 ccw(c75.35,36.737) 75.35,36.537 75.55,36.537 75.75,36.537 cw(c75.75,36.337) 75.95,36.337 cw(c75.75,36.337) 75.75,36.137 75.55,36.137 75.35,36.137 ccw(c75.35,35.937) 75.15,35.937 ccw(c75.35,35.937) 75.35,35.738 75.55,35.738 75.75,35.738 cw(c75.75,35.538) 75.95,35.538 cw(c75.75,35.538) 75.75,35.338 ccw(c75.75,35.138) 75.55,35.138 75.55,34.938 75.55,34.738 P4.29@75.55,26.975
SD4DATA2: P4.27 P5.56 | length 36.5
  Component Side w0.2: P5.56@71.033,46.832 71.033,47.858 71.25,48.075 73.85,48.075 v1(74.675,47.25)
  Solder Side w0.2: v1(74.675,47.25) 74.65,47.25 74.662,47.238 74.75,47.15 74.75,46.625 ccw(c74.95,46.625) 74.95,46.425 cw(c74.95,46.225) 75.15,46.225 cw(c74.95,46.225) 74.95,46.025 74.75,46.025 73.454,46.025 ccw(c73.454,45.825) 73.254,45.825 ccw(c73.454,45.825) 73.454,45.625 74.75,45.625 74.95,45.625 cw(c74.95,45.425) 75.15,45.425 cw(c74.95,45.425) 74.95,45.225 74.75,45.225 74.212,45.225 ccw(c74.212,45.025) 74.012,45.025 ccw(c74.212,45.025) 74.212,44.825 74.75,44.825 74.95,44.825 cw(c74.95,44.625) 75.15,44.625 cw(c74.95,44.625) 74.95,44.425 74.75,44.425 74.432,44.425 ccw(c74.432,44.225) 74.232,44.225 ccw(c74.432,44.225) 74.432,44.025 74.75,44.025 74.95,44.025 cw(c74.95,43.825) 75.15,43.825 cw(c74.95,43.825) 74.95,43.625 74.75,43.625 74.458,43.625 ccw(c74.458,43.425) 74.258,43.425 ccw(c74.458,43.425) 74.458,43.225 74.75,43.225 74.95,43.225 cw(c74.95,43.025) 75.15,43.025 cw(c74.95,43.025) 74.95,42.825 ccw(c74.95,42.625) 74.75,42.625 ccw(c74.95,42.625) 74.95,42.425 cw(c74.95,42.225) 75.15,42.225 cw(c74.95,42.225) 74.95,42.025 ccw(c74.95,41.825) 74.75,41.825 ccw(c74.95,41.825) 74.95,41.625 cw(c74.95,41.425) 75.15,41.425 cw(c74.95,41.425) 74.95,41.225 ccw(c74.95,41.025) 74.75,41.025 74.75,40.825 74.75,40.425 74.75,40.025 74.75,39.625 74.75,39.225 74.75,38.825 74.75,38.425 74.75,38.025 74.75,37.875 74.75,37.675 74.75,37.275 74.75,36.875 74.75,36.475 74.75,36.075 74.75,35.675 74.75,35.275 74.75,35.075 ccw(c74.95,35.075) 74.95,34.875 cw(c74.95,34.675) 75.15,34.675 cw(c74.95,34.675) 74.95,34.475 ccw(c74.95,34.275) 74.75,34.275 ccw(c74.95,34.275) 74.95,34.075 cw(c74.95,33.875) 75.15,33.875 cw(c74.95,33.875) 74.95,33.675 ccw(c74.95,33.475) 74.75,33.475 ccw(c74.95,33.475) 74.95,33.275 cw(c74.95,33.075) 75.15,33.075 cw(c74.95,33.075) 74.95,32.875 ccw(c74.95,32.675) 74.75,32.675 74.75,29.375 P4.27@74.75,26.975
SD4DATA3: P4.10 P5.47 | length 34.9
  Component Side w0.2: P5.47@69.032,53.004 69.032,50.068 v1(70.175,48.925) ; v1(73.075,28.925) 73.95,28.05 v1(73.95,25.7)
  Solder Side w0.2: v1(70.175,48.925) 71.2,47.9 71.2,47.6 ccw(c71.4,47.6) 71.4,47.4 71.621,47.4 cw(c71.621,47.2) 71.821,47.2 cw(c71.621,47.2) 71.621,47 71.2,47 70.729,47 ccw(c70.729,46.8) 70.529,46.8 ccw(c70.729,46.8) 70.729,46.6 71.2,46.6 71.621,46.6 cw(c71.621,46.4) 71.821,46.4 cw(c71.621,46.4) 71.621,46.2 71.2,46.2 70.729,46.2 ccw(c70.729,46) 70.529,46 ccw(c70.729,46) 70.729,45.8 71,45.8 cw(c71,45.6) 71.2,45.6 71.2,45.225 71.2,44.3 73.075,42.425 v1(73.075,28.925) ; P4.10@73.95,24.475 v1(73.95,25.7)
SD4DATA4: P4.4 P5.60 | length 36.5
  Component Side w0.2: P5.60@72.033,46.832 72.033,46.3 74.975,46.3 76.35,44.925 76.35,40.325 76.35,39.85 ccw(c76.35,39.65) 76.15,39.65 ccw(c76.35,39.65) 76.35,39.45 cw(c76.35,39.25) 76.55,39.25 cw(c76.35,39.25) 76.35,39.05 ccw(c76.35,38.85) 76.15,38.85 ccw(c76.35,38.85) 76.35,38.65 cw(c76.35,38.45) 76.55,38.45 cw(c76.35,38.45) 76.35,38.25 ccw(c76.35,38.05) 76.15,38.05 ccw(c76.35,38.05) 76.35,37.85 cw(c76.35,37.65) 76.55,37.65 cw(c76.35,37.65) 76.35,37.45 ccw(c76.35,37.25) 76.15,37.25 ccw(c76.35,37.25) 76.35,37.05 cw(c76.35,36.85) 76.55,36.85 cw(c76.35,36.85) 76.35,36.65 ccw(c76.35,36.45) 76.15,36.45 ccw(c76.35,36.45) 76.35,36.25 cw(c76.35,36.05) 76.55,36.05 cw(c76.35,36.05) 76.35,35.85 76.35,35.45 cw(c76.35,35.25) 76.55,35.25 cw(c76.35,35.25) 76.35,35.05 76.35,34.65 cw(c76.35,34.45) 76.55,34.45 cw(c76.35,34.45) 76.35,34.25 76.35,33.85 cw(c76.35,33.65) 76.55,33.65 cw(c76.35,33.65) 76.35,33.45 76.35,33.05 cw(c76.35,32.85) 76.55,32.85 cw(c76.35,32.85) 76.35,32.65 76.35,32.25 cw(c76.35,32.05) 76.55,32.05 cw(c76.35,32.05) 76.35,31.85 76.35,31.45 cw(c76.35,31.25) 76.55,31.25 cw(c76.35,31.25) 76.35,31.05 76.35,30.65 cw(c76.35,30.45) 76.55,30.45 cw(c76.35,30.45) 76.35,30.25 76.35,29.85 cw(c76.35,29.65) 76.55,29.65 cw(c76.35,29.65) 76.35,29.45 ccw(c76.35,29.25) 76.15,29.25 ccw(c76.35,29.25) 76.35,29.05 cw(c76.35,28.85) 76.55,28.85 cw(c76.35,28.85) 76.35,28.65 ccw(c76.35,28.45) 76.15,28.45 ccw(c76.35,28.45) 76.35,28.25 cw(c76.35,28.05) 76.55,28.05 cw(c76.35,28.05) 76.35,27.85 ccw(c76.35,27.65) 76.15,27.65 ccw(c76.35,27.65) 76.35,27.45 cw(c76.35,27.25) 76.55,27.25 cw(c76.35,27.25) 76.35,27.05 ccw(c76.35,26.85) 76.15,26.85 ccw(c76.35,26.85) 76.35,26.65 cw(c76.35,26.45) 76.55,26.45 cw(c76.35,26.45) 76.35,26.25 ccw(c76.35,26.05) 76.15,26.05 ccw(c76.35,26.05) 76.35,25.85 cw(c76.35,25.65) 76.55,25.65 cw(c76.35,25.65) 76.35,25.45 ccw(c76.35,25.25) 76.15,25.25 ccw(c76.35,25.25) 76.35,25.05 cw(c76.35,24.85) 76.55,24.85 cw(c76.35,24.85) 76.35,24.65 ccw(c76.35,24.45) 76.15,24.45 ccw(c76.35,24.45) 76.35,24.25 cw(c76.35,24.05) 76.55,24.05 cw(c76.35,24.05) 76.35,23.85 ccw(c76.35,23.65) 76.15,23.65 ccw(c76.35,23.65) 76.35,23.45 76.35,23.25 v1(76.35,22.95)
  Solder Side w0.2: v1(76.35,22.95) P4.4@76.35,24.475
SD4DATA5: P4.2 P5.57 | length 36.4
  Component Side w0.2: P5.57@71.532,53.004 71.532,51.693 72.45,50.775 76.125,50.775 77.15,49.75 77.15,48.825 77.15,46.575 ccw(c77.35,46.575) 77.35,46.375 77.528,46.375 cw(c77.528,46.175) 77.728,46.175 cw(c77.528,46.175) 77.528,45.975 77.15,45.975 76.772,45.975 ccw(c76.772,45.775) 76.572,45.775 ccw(c76.772,45.775) 76.772,45.575 77.15,45.575 77.528,45.575 cw(c77.528,45.375) 77.728,45.375 cw(c77.528,45.375) 77.528,45.175 77.15,45.175 76.95,45.175 ccw(c76.95,44.975) 76.75,44.975 ccw(c76.95,44.975) 76.95,44.775 cw(c76.95,44.575) 77.15,44.575 v1(77.15,25.7)
  Solder Side w0.2: P4.2@77.15,24.475 v1(77.15,25.7)
SD4DATA6: P4.33 P5.59 | length 36.5
  Component Side w0.2: P5.59@72.033,53.483 72.075,53.525 v1(73.775,53.525)
  Solder Side w0.2: v1(73.775,53.525) 74.65,53.525 77.15,51.025 77.15,36.3 77.15,32.55 ccw(c77.35,32.55) 77.35,32.35 77.749,32.35 cw(c77.749,32.15) 77.949,32.15 cw(c77.749,32.15) 77.749,31.95 77.35,31.95 ccw(c77.35,31.75) 77.15,31.75 ccw(c77.35,31.75) 77.35,31.55 77.749,31.55 cw(c77.749,31.35) 77.949,31.35 cw(c77.749,31.35) 77.749,31.15 77.35,31.15 ccw(c77.35,30.95) 77.15,30.95 ccw(c77.35,30.95) 77.35,30.75 77.749,30.75 cw(c77.749,30.55) 77.949,30.55 cw(c77.749,30.55) 77.749,30.35 77.35,30.35 ccw(c77.35,30.15) 77.15,30.15 ccw(c77.35,30.15) 77.35,29.95 77.749,29.95 cw(c77.749,29.75) 77.949,29.75 cw(c77.749,29.75) 77.749,29.55 77.35,29.55 ccw(c77.35,29.35) 77.15,29.35 ccw(c77.35,29.35) 77.35,29.15 77.749,29.15 cw(c77.749,28.95) 77.949,28.95 cw(c77.749,28.95) 77.749,28.75 77.35,28.75 ccw(c77.35,28.55) 77.15,28.55 77.15,28.35 77.15,28.15 P4.33@77.15,26.975
SD4DATA7: P4.31 P5.55 | length 36.5
  Component Side w0.2: P5.55@71.033,53.004 71.033,51.317 72.6,49.75 v1(75.375,49.75)
  Solder Side w0.2: v1(75.375,49.75) 76.35,48.775 76.35,44.4 76.35,43.925 ccw(c76.35,43.725) 76.15,43.725 ccw(c76.35,43.725) 76.35,43.525 cw(c76.35,43.325) 76.55,43.325 cw(c76.35,43.325) 76.35,43.125 ccw(c76.35,42.925) 76.15,42.925 ccw(c76.35,42.925) 76.35,42.725 cw(c76.35,42.525) 76.55,42.525 cw(c76.35,42.525) 76.35,42.325 ccw(c76.35,42.125) 76.15,42.125 ccw(c76.35,42.125) 76.35,41.925 cw(c76.35,41.725) 76.55,41.725 cw(c76.35,41.725) 76.35,41.525 ccw(c76.35,41.325) 76.15,41.325 ccw(c76.35,41.325) 76.35,41.125 cw(c76.35,40.925) 76.55,40.925 cw(c76.35,40.925) 76.35,40.725 ccw(c76.35,40.525) 76.15,40.525 ccw(c76.35,40.525) 76.35,40.325 cw(c76.35,40.125) 76.55,40.125 cw(c76.35,40.125) 76.35,39.925 76.35,39.525 cw(c76.35,39.325) 76.55,39.325 cw(c76.35,39.325) 76.35,39.125 76.35,38.725 cw(c76.35,38.525) 76.55,38.525 cw(c76.35,38.525) 76.35,38.325 76.35,37.925 cw(c76.35,37.725) 76.55,37.725 cw(c76.35,37.725) 76.35,37.525 76.35,37.125 cw(c76.35,36.925) 76.55,36.925 cw(c76.35,36.925) 76.35,36.725 76.35,36.325 cw(c76.35,36.125) 76.55,36.125 cw(c76.35,36.125) 76.35,35.925 76.35,35.525 76.35,35.125 ccw(c76.35,34.925) 76.15,34.925 ccw(c76.35,34.925) 76.35,34.725 76.35,34.325 ccw(c76.35,34.125) 76.15,34.125 ccw(c76.35,34.125) 76.35,33.925 76.35,33.525 ccw(c76.35,33.325) 76.15,33.325 ccw(c76.35,33.325) 76.35,33.125 76.35,32.725 ccw(c76.35,32.525) 76.15,32.525 ccw(c76.35,32.525) 76.35,32.325 cw(c76.35,32.125) 76.55,32.125 cw(c76.35,32.125) 76.35,31.925 ccw(c76.35,31.725) 76.15,31.725 ccw(c76.35,31.725) 76.35,31.525 cw(c76.35,31.325) 76.55,31.325 cw(c76.35,31.325) 76.35,31.125 ccw(c76.35,30.925) 76.15,30.925 ccw(c76.35,30.925) 76.35,30.725 cw(c76.35,30.525) 76.55,30.525 cw(c76.35,30.525) 76.35,30.325 ccw(c76.35,30.125) 76.15,30.125 ccw(c76.35,30.125) 76.35,29.925 cw(c76.35,29.725) 76.55,29.725 cw(c76.35,29.725) 76.35,29.525 ccw(c76.35,29.325) 76.15,29.325 ccw(c76.35,29.325) 76.35,29.125 cw(c76.35,28.925) 76.55,28.925 cw(c76.35,28.925) 76.35,28.725 ccw(c76.35,28.525) 76.15,28.525 ccw(c76.35,28.525) 76.35,28.325 76.35,28.125 P4.31@76.35,26.975
SD4RESET: P4.12 P5.50 R4.2 | length 35.7
  Component Side w0.2: P5.50@69.532,46.832 69.532,45.143 v1(70.2,44.475) ; R4.2@73.15,21.675 v1(73.15,23.05)
  Solder Side w0.2: v1(70.2,44.475) 70.2,43.95 ccw(c70.4,43.95) 70.4,43.75 70.735,43.75 cw(c70.735,43.55) 70.935,43.55 cw(c70.735,43.55) 70.735,43.35 70.4,43.35 ccw(c70.4,43.15) 70.2,43.15 ccw(c70.4,43.15) 70.4,42.95 70.735,42.95 cw(c70.735,42.75) 70.935,42.75 cw(c70.735,42.75) 70.735,42.55 70.4,42.55 ccw(c70.4,42.35) 70.2,42.35 ccw(c70.4,42.35) 70.4,42.15 70.735,42.15 cw(c70.735,41.95) 70.935,41.95 cw(c70.735,41.95) 70.735,41.75 70.4,41.75 ccw(c70.4,41.55) 70.2,41.55 ccw(c70.4,41.55) 70.4,41.35 70.735,41.35 cw(c70.735,41.15) 70.935,41.15 cw(c70.735,41.15) 70.735,40.95 70.4,40.95 ccw(c70.4,40.75) 70.2,40.75 ccw(c70.4,40.75) 70.4,40.55 70.735,40.55 cw(c70.735,40.35) 70.935,40.35 cw(c70.735,40.35) 70.735,40.15 70.4,40.15 ccw(c70.4,39.95) 70.2,39.95 ccw(c70.4,39.95) 70.4,39.75 70.735,39.75 cw(c70.735,39.55) 70.935,39.55 cw(c70.735,39.55) 70.735,39.35 70.4,39.35 ccw(c70.4,39.15) 70.2,39.15 ccw(c70.4,39.15) 70.4,38.95 70.735,38.95 cw(c70.735,38.75) 70.935,38.75 cw(c70.735,38.75) 70.735,38.55 70.4,38.55 ccw(c70.4,38.35) 70.2,38.35 70.2,37.175 70.2,26.35 70.75,25.8 72.7,25.8 73.15,25.35 P4.12@73.15,24.475 v1(73.15,23.05)
VDDGPIO: P5.1 P5.2 P9.2 | length 3
  Component Side w0.2: v1(56.5,53.3) 56.796,53.004 P5.1@57.532,53.004 ; v1(57.25,45.2) 57.532,45.482 P5.2@57.532,46.832
  Solder Side w0.2: v1@56.425,53.3 v1(56.5,53.3)
pads on no net: P5.0 P6.0 P6.1 P6.2 P6.3 P6.4 P6.5 P6.6 P6.7 P6.8 P6.9 P6.10 P6.13 P6.14 P6.15 P6.16 P6.17 P6.18 P6.19 P6.20 P6.23 P6.24 P6.25 P6.26 P6.27 P6.28 P6.29 P6.30 P6.33 P6.34 P6.35 P6.36 P6.37 P6.38 P6.39 P6.40 P6.43 P6.44 P6.45 P6.46 P6.47 P6.48 P6.49 P6.50 P6.53 P6.54 P6.55 P6.56 P6.57 P6.58 P6.59 P6.60 P7.0 P7.1 P7.2 P7.3 P7.4 P7.5 P7.6 P7.7 P7.8 P7.9 P7.10 P7.13 P7.14 P7.15 P7.16 P7.17 P7.18 P7.19 P7.20 P7.23 P7.24 P7.25 P7.26 P7.27 P7.28 P7.29 P7.30 P7.33 P7.34 P7.35 P7.36 P7.37 P7.38 P7.39 P7.40 P7.43 P7.44 P7.45 P7.46 P7.47 P7.48 P7.49 P7.50 P7.53 P7.54 P7.55 P7.56 P7.57 P7.58 P7.59 P7.60 P8.0 P8.1 P8.2 P8.3 P8.4 P8.5 P8.6 P8.7 P8.8 P8.9 P8.10 P8.13 P8.14 P8.15 P8.16 P8.17 P8.18 P8.19 P8.20 P8.23 P8.24 P8.25 P8.26 P8.27 P8.28 P8.29 P8.30 P8.33 P8.34 P8.37 P8.38 P8.39 P8.40 P8.43 P8.44 P8.45 P8.46 P8.47 P8.48 P8.49 P8.50 P8.53 P8.54 P8.55 P8.56 P8.57 P8.58 P8.59 P8.60

## Polygon pours and split planes (outlines as drawn)
GND on Solder Side "GND_L04_P000" (solid, pour order 0): 0.1,54.625 86.375,54.625 86.375,0 0.2,0 0,0.2
GND on Component Side "GND_L01_P002" (solid, pour order 2): 0,54.65 86.375,54.65 86.375,0 0.025,0 0.025,54.625 0,54.65
GND on Ground Plane (split plane): 85.858,0.502 0.502,0.502 0.502,54.108 85.858,54.108
VDDGPIO on Power Plane (split plane): 58.121,46.175 58.13,46.125 58.158,46.083 62.333,41.908 62.375,41.88 62.425,41.871 81.796,41.871 82.146,41.521 82.146,39.879 81.796,39.529 60.979,39.529 55.929,44.579 55.929,54.108 58.121,54.108
3.3V on Power Plane (split plane): 85.858,0.502 0.502,0.502 0.502,54.108 55.671,54.108 55.671,44.525 55.68,44.475 55.708,44.433 60.833,39.308 60.875,39.28 60.925,39.271 81.85,39.271 81.9,39.28 81.942,39.308 82.367,39.733 82.395,39.775 82.404,39.825 82.404,41.575 82.395,41.625 82.367,41.667 81.942,42.092 81.9,42.12 81.85,42.129 62.479,42.129 58.379,46.229 58.379,54.108 85.858,54.108

## Other copper
Component Side:
  pour cut-out: 79.425,54.6 86.475,54.6 86.5,54.625 86.5,47.475 79.475,47.475 79.45,47.5
  pour cut-out: 0.025,54.6 7.075,54.6 7.1,54.625 7.1,47.475 0.075,47.475 0.05,47.5
  pour cut-out: 0.025,7.001 7.075,7.001 7.1,7.026 7.1,-0.124 0.075,-0.124 0.05,-0.099
  pour cut-out: 79.5,6.925 86.55,6.925 86.575,6.95 86.575,-0.2 79.55,-0.2 79.525,-0.175
Solder Side:
  pour cut-out: 79.45,47.525 79.45,54.625 86.5,54.625 86.5,47.525 86.525,47.5
  pour cut-out: 0.025,47.55 0.025,54.65 7.075,54.65 7.075,47.55 7.1,47.525
  pour cut-out: 0.012,-0.099 0.012,7.001 7.062,7.001 7.062,-0.099 7.087,-0.124
  pour cut-out: 79.525,-0.2 79.525,6.9 86.575,6.9 86.575,-0.2 86.6,-0.225
Power Plane (plane layer: these items are gaps in the copper):
  lines w0.254: 55.8,54.61 55.8,44.525 60.925,39.4 81.85,39.4 82.275,39.825 82.275,41.575 81.85,42 62.425,42 58.25,46.175 58.25,54.625

## Silkscreen, mask and mechanical layers (free items; w line width, h text height)
Top Overlay:
  text "GPIO" at 49.675,48.525 h1
  text "NORTH" at 9.627,42.774 h1
  text "The Pars Board v1.0" at 34.85,13.3 h1
  text "POWER" at 48,2.45 h1
  text "SOUTH" at 33.3,2.025 h1
Bottom Overlay:
  text "The Pars Board v1.0" at 51.775,43.1 h1
Mechanical 1:
  lines w0.1: 0,6.35 6.35,6.35 6.35,0 ; 0,48.26 6.35,48.26 6.35,54.61 ; 80.01,0 80.01,6.35 86.36,6.35 ; 80.01,54.61 80.01,48.26 86.36,48.26
  lines w0.254: 0,0 0,54.61 86.36,54.61 86.36,0 0,0